# Altium PCB MB1520.PcbDoc (part 6 of 7)
Units mm, origin at the board's own origin, x right, y up, seen from the top; angles counter-clockwise.
Board outline 159 x 88 mm, 6 copper layers (Top Layer, Signal Layer 1, Signal Layer 2, Signal Layer 3, Signal Layer 4, Bottom Layer), stack 1.572 mm thick; 473 components, 377 nets, 1832 pads, 1378 vias.
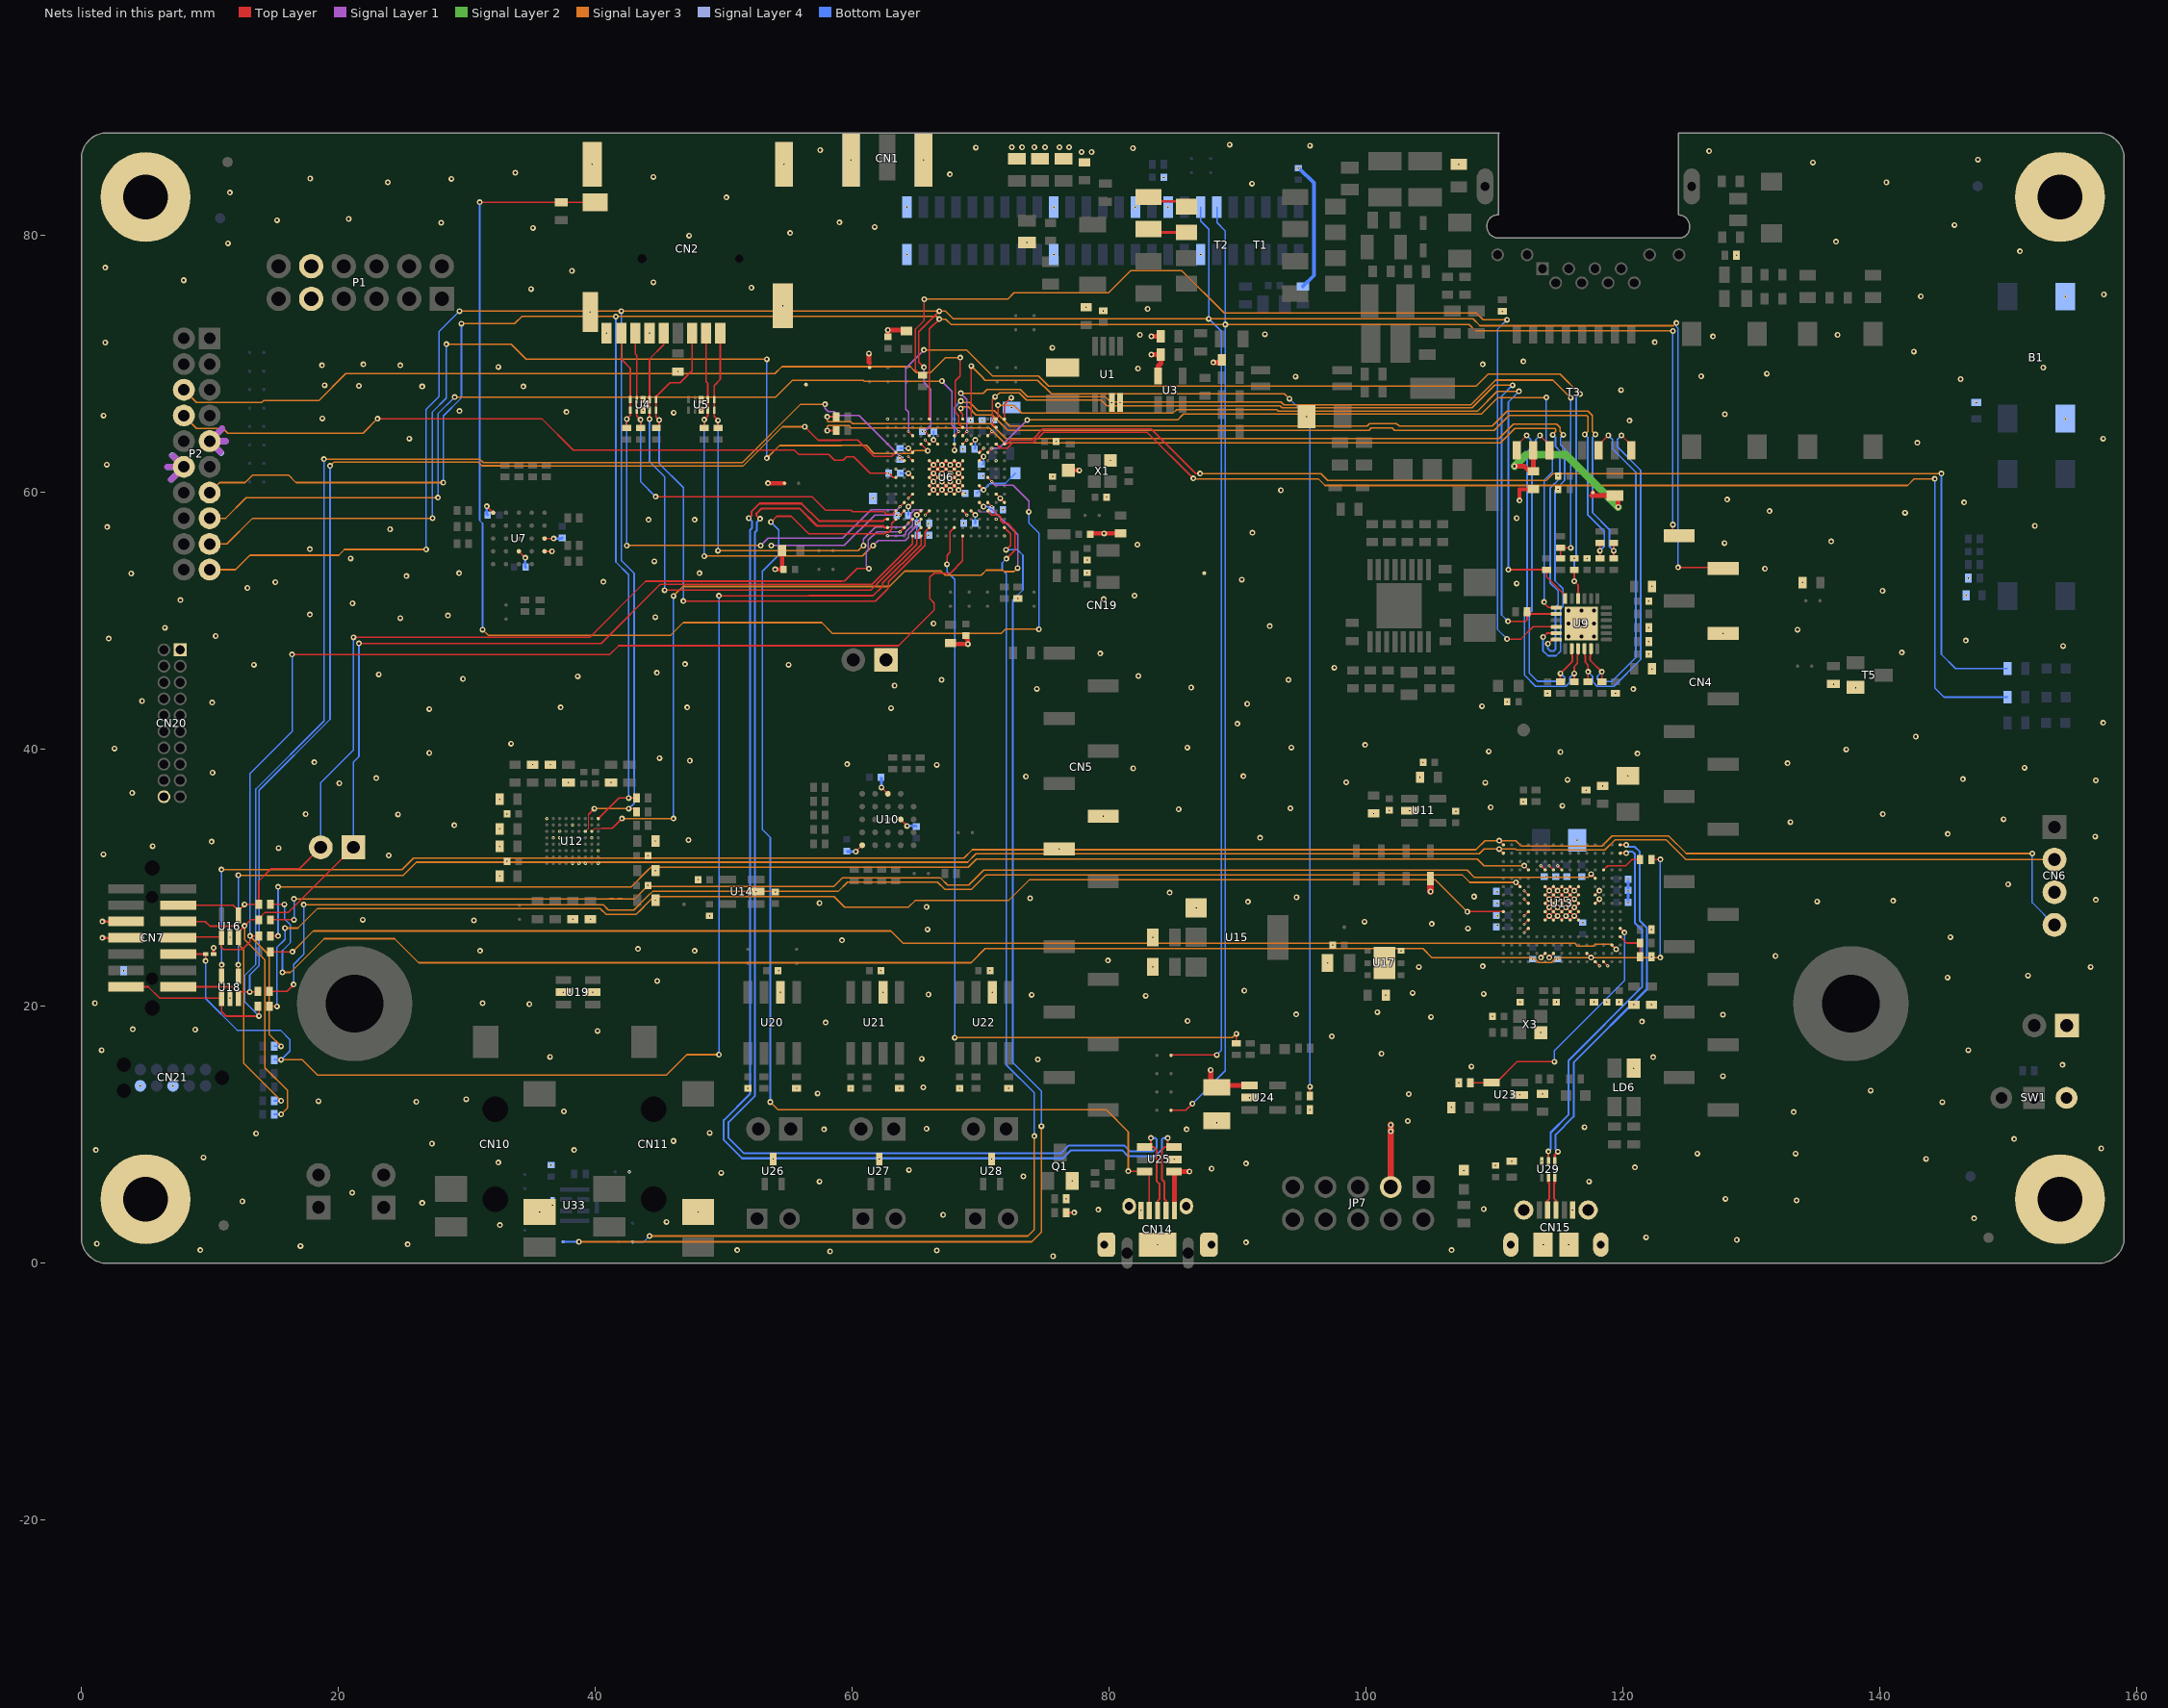
[diagram p9: the nets of this part, all layers, seen from the top]

## Via types
v1: diameter 0.45, hole 0.2, Top Layer to Bottom Layer, tented both sides, 1099 vias
v2: diameter 0.25, hole 0.1, Top Layer to Signal Layer 1, tented both sides, 217 vias
v3: diameter 0.25, hole 0.1, Signal Layer 4 to Bottom Layer, tented both sides, 53 vias
v4: diameter 0.6, hole 0.3, Top Layer to Bottom Layer, tented both sides, 9 vias

## Nets (pads, with @x,y where several pads share a name; then routed paths per layer and width w, separated by ;. In a path a pad name is that pad's centre, name@x,y a point inside that pad or via, vN(x,y) a via of type N, cw(c..) or ccw(c..) an arc to the next point about the centre after c; other vN are vias at no path point) (continued)
POE7: B1.1 B1.2 C3.1 C4.1 C5.1 C6.1 C11.1 C21.1 C22.1 C23.2 C24.2 C25.2 C26.1 C30.2 C32.1 C33.1 C34.2 C35.1 C36.2 C37.1 C38.1 C43.1 C44.1 C45.1 C46.2 C47.2 C48.1 C49.1 C50.1 C51.1 C53.1 C54.2 C55.2 C56.1 C61.2 C62.1 C63.1 C65.1 C66.1 C67.1 C70.1 C71.1 C72.1 C73.2 C74.1 C75.1 C76.1 C77.2 C78.2 C79.1 C80.1 C81.2 C82.2 C83.1 C84.1 C85.1 C86.2 C87.1 C88.1 C91.1 C92.1 C93.1 C94.1 C95.2 C96.1 C97.1 C98.1 C99.1 C100.1 C101.1 C102.1 C103.1 C104.1 C105.1 C106.1 C107.1 C108.1 C109.1 C110.1 C111.1 C112.2 C113.1 C114.1 C115.1 C116.2 C117.1 C120.1 C121.1 C122.1 C123.2 C124.1 C125.1 C126.1 C127.1 C128.1 C129.1 C130.2 C131.1 C132.1 C133.1 C134.1 C135.1 C136.1 C137.1 C139.1 C140.1 C141.1 C142.1 C143.1 C144.1 C145.1 C146.1 C147.1 C148.1 C149.1 C150.1 C151.1 C152.1 C153.1 C154.1 C155.1 C156.1 C157.1 C158.2 CN1.2 CN1.3 CN1.4 CN1.5 CN2.6 CN2.9 CN2.11 CN2.12 CN2.13 CN2.14 CN4.7 CN5.6 CN5.7 CN6.3 CN7.5 CN7.7 CN10.3 CN11.3 CN14.5 CN14.6 CN14.7 CN14.8 CN14.9 CN14.10 CN15.5 CN15.6 CN15.7 CN15.8 CN15.9 CN15.10 CN15.11 CN19.1 CN19.2 CN19.19 CN19.20 CN19.30 CN19.34 CN19.37 CN20.1 CN20.20 CN21.3 CN21.5 H1.1 H2.1 H3.1 H4.1 JP3.1 LD5.2 LD6.1 P1.5 P1.11 P2.5 P2.16 Q1.2 R1.2 R6.1 R13.1 R16.1 R19.2 R21.1 R57.2 R64.1 R70.2 R71.1 R73.2 R80.2 R84.1 R85.1 R89.1 R105.1 R109.1 R113.2 R120.2 R122.2 R124.2 R127.2 R129.1 R133.2 R137.1 R142.1 R146.1 SB35.1 SW1.3 T1.5 T1.6 T2.7 T2.8 T5.2 TP1.1 TP2.1 U1.7 U1.8 U3.5 U4.3 U4.8 U5.3 U5.8 U6.A1 U6.A15 U6.C2 U6.D6 U6.D10 U6.E1 U6.F2 U6.F6 U6.F7 U6.F8 U6.F9 U6.F10 U6.F12 U6.G6 U6.G7 U6.G8 U6.G9 U6.G10 U6.H6 U6.H7 U6.H8 U6.H9 U6.H10 U6.J6 U6.J7 U6.J8 U6.J9 U6.J10 U6.J14 U6.K2 U6.K6 U6.K7 U6.K8 U6.K9 U6.K10 U6.K12 U6.L4 U6.M6 U6.M10 U6.N3 U6.R1 U6.R15 U7.B1 U7.B3 U7.C1 U7.E5 U9.EP U10.B3 U10.C1 U10.E5 U11.2 U12.A1 U12.A3 U12.A4 U12.A5 U12.C1 U12.D6 U12.E2 U12.E7 U12.E8 U12.F7 U12.G5 U12.H9 U13.D5 U13.D6 U13.D7 U13.D8 U13.D9 U13.F2 U13.F6 U13.F7 U13.F8 U13.F9 U13.F10 U13.F12 U13.G2 U13.G6 U13.G7 U13.G8 U13.G9 U13.G10 U13.G12 U13.H6 U13.H7 U13.H8 U13.H9 U13.H10 U13.H12 U13.J6 U13.J7 U13.J8 U13.J9 U13.J10 U13.K6 U13.K7 U13.K8 U13.K9 U13.K10 U13.M1 U13.M8 U13.M9 U13.N1 U14.2 U15.1 U16.2 U17.6 U17.EP U18.2 U19.2 U19.5 U20.2 U21.2 U22.2 U23.2 U24.2 U25.2 U26.3 U27.3 U28.3 U29.3 U30.2 U31.2 U32.2 U33.5 U34.2 X1.2 X3.2 | length 138.7
  Top Layer w0.1: U6.R1@71.85,65.725 71.85,66.85 v1(72.375,67.375)
  Top Layer w0.12: v2(112.308,25.752) U13.D5@112.633,26.077 ; v2(112.308,26.402) U13.D6@112.633,26.727 ; v2(112.308,27.052) U13.D7@112.633,27.377 ; v2(112.308,28.352) U13.D8@112.633,28.027 ; v2(112.308,29.002) U13.D9@112.633,28.677 ; v1(113.608,23.802) U13.F2@113.933,24.127 ; v2(113.608,30.952) U13.F12@113.933,30.627 ; U13.F6@113.933,26.727 U13.G7@114.583,27.377 ; U13.F10@113.933,29.327 v1(114.258,29.002) U13.G9@114.583,28.677 ; v1(114.258,23.802) U13.G2@114.583,24.127 ; v2(114.258,30.952) U13.G12@114.583,30.627 ; v2(114.908,30.952) U13.H12@115.233,30.627 ; U13.K8@116.533,28.027 v1(116.208,28.352) U13.J9@115.883,28.677 ; U13.K10@116.533,29.327 U13.J9@115.883,28.677 ; U13.K6@116.533,26.727 v1(116.208,27.052) U13.J7@115.883,27.377 ; U13.K8@116.533,28.027 U13.J7@115.883,27.377 ; U13.M1@117.833,23.477 v2(118.158,23.152) ; U13.M8@117.833,28.027 v1(118.158,28.352) ; U13.M9@117.833,28.677 v1(118.158,29.002) ; U13.N1@118.483,23.477 v2(118.808,23.152) ; U13.G7@114.583,27.377 v1(114.908,27.052) U13.H6@115.233,26.727 U13.J7@115.883,27.377 ; U13.G7@114.583,27.377 v1(114.258,27.702) U13.F8@113.933,28.027 U13.G9@114.583,28.677 ; U13.G7@114.583,27.377 U13.H8@115.233,28.027 ; U13.G8@114.583,28.027 U13.F7@113.933,27.377 v1(114.258,27.052) U13.G6@114.583,26.727 U13.H7@115.233,27.377 ; U13.G8@114.583,28.027 v1(114.908,27.702) U13.H7@115.233,27.377 ; U13.G8@114.583,28.027 U13.H9@115.233,28.677 ; U13.G8@114.583,28.027 v1(114.258,28.352) U13.F9@113.933,28.677 U13.G10@114.583,29.327 v1(114.908,29.002) U13.H9@115.233,28.677 ; U13.G9@114.583,28.677 v1(114.908,28.352) U13.H8@115.233,28.027 ; U13.G9@114.583,28.677 U13.H10@115.233,29.327 v1(115.558,29.002) U13.J9@115.883,28.677 ; U13.H7@115.233,27.377 v1(115.558,27.052) U13.J6@115.883,26.727 U13.K7@116.533,27.377 v1(116.208,27.702) U13.J8@115.883,28.027 ; U13.H7@115.233,27.377 U13.J8@115.883,28.027 ; U13.H8@115.233,28.027 v1(115.558,27.702) U13.J7@115.883,27.377 ; U13.H8@115.233,28.027 U13.J9@115.883,28.677 ; U13.H9@115.233,28.677 v1(115.558,28.352) U13.J8@115.883,28.027 ; U13.H9@115.233,28.677 U13.J10@115.883,29.327 v1(116.208,29.002) U13.K9@116.533,28.677 U13.J8@115.883,28.027
  Top Layer w0.127: v1(31.55,58.925) U7.E5@32.05,58.425 ; U7.B3@34.05,55.425 v1(34.55,54.925) ; U7.B1@36.05,55.425 v1(36.625,55.425) ; U7.C1@36.05,56.425 v1(36.75,56.425) ; C47.2@54.55,54.125 C47.2@54.65,54.025 ; v1(60.275,32.05) U10.E5@60.775,32.55 ; v1(62.275,37.05) U10.C1@62.775,36.55 ; v2(62.745,56.629) U6.A15@62.75,56.625 ; U10.B3@63.775,34.55 v1(64.275,34.05) ; v2(64.375,59.55) U6.F12@64.7,59.875 ; v2(64.375,62.8) U6.K12@64.7,62.475 ; v2(65.675,58.25) U6.D10@66,58.575 ; v2(65.675,64.1) U6.M10@66,63.775 ; U6.F10@66,59.875 v1(66.325,60.2) ; U6.K10@66,62.475 v1(66.325,62.15) ; U6.F8@67.3,59.875 v1(66.975,60.2) ; U6.F8@67.3,59.875 v1(67.625,60.2) ; U6.G8@67.3,60.525 v1(67.625,60.2) ; U6.D6@68.6,58.575 v2(68.925,58.25) ; U6.F6@68.6,59.875 v1(68.275,60.2) ; U6.K6@68.6,62.475 v1(68.275,62.15) ; U6.M6@68.6,63.775 v2(68.925,64.1) ; U6.L4@69.9,63.125 v2(70.225,63.45) ; U6.N3@70.55,64.425 v2(70.875,64.75) ; U6.F2@71.2,59.875 v1(71.525,59.55) U6.E1@71.85,59.225 ; C43.1@78.525,56.75 C43.1@78.6,56.825 ; v1(66.325,60.2) U6.F9@66.65,59.875 v1(66.975,60.2) ; v1(66.325,60.2) U6.G10@66,60.525 v1(66.325,60.85) ; v1(66.325,60.2) U6.G9@66.65,60.525 ; v1(66.325,60.85) v1(66.975,61.5) ; v1(66.325,60.85) U6.G9@66.65,60.525 ; v1(66.325,60.85) U6.H10@66,61.175 v1(66.325,61.5) ; v1(66.325,61.5) v1(66.975,62.15) ; v1(66.325,61.5) U6.J10@66,61.825 v1(66.325,62.15) ; v1(66.325,61.5) v1(66.975,60.85) ; v1(66.325,62.15) U6.K9@66.65,62.475 v1(66.975,62.15) ; v1(66.325,62.15) v1(66.975,61.5) ; U6.G9@66.65,60.525 v1(66.975,60.85) ; U6.G9@66.65,60.525 v1(66.975,60.2) ; v1(66.975,60.2) U6.G8@67.3,60.525 ; v1(66.975,60.85) v1(67.625,61.5) ; v1(66.975,60.85) U6.G8@67.3,60.525 ; v1(66.975,61.5) v1(67.625,62.15) ; v1(66.975,61.5) v1(67.625,60.85) ; v1(66.975,62.15) v1(67.625,61.5) ; v1(66.975,62.15) U6.K8@67.3,62.475 v1(67.625,62.15) ; U6.G8@67.3,60.525 v1(67.625,60.85) ; v1(67.625,60.2) U6.F7@67.95,59.875 v1(68.275,60.2) ; v1(67.625,60.2) U6.G7@67.95,60.525 ; v1(67.625,60.85) U6.G7@67.95,60.525 ; v1(67.625,60.85) U6.H7@67.95,61.175 ; v1(67.625,61.5) U6.H7@67.95,61.175 ; v1(67.625,61.5) U6.J7@67.95,61.825 ; v1(67.625,62.15) U6.J7@67.95,61.825 ; v1(67.625,62.15) U6.K7@67.95,62.475 v1(68.275,62.15) ; U6.G7@67.95,60.525 v1(68.275,60.85) ; U6.G7@67.95,60.525 v1(68.275,60.2) ; U6.H7@67.95,61.175 v1(68.275,61.5) ; U6.H7@67.95,61.175 v1(68.275,60.85) ; U6.J7@67.95,61.825 v1(68.275,62.15) ; U6.J7@67.95,61.825 v1(68.275,61.5) ; v1(68.275,60.2) U6.G6@68.6,60.525 v1(68.275,60.85) ; v1(68.275,60.85) U6.H6@68.6,61.175 v1(68.275,61.5) ; v1(68.275,61.5) U6.J6@68.6,61.825 v1(68.275,62.15)
  Top Layer w0.2: v1(1.629,25.339) CN7.7@3.479,25.339 ; v1(1.629,26.609) CN7.5@3.479,26.609 ; U34.2@10.287,24.075 v1(10.287,24.563) ; T2.7@83.05,80.505 83.3,80.255 T1.6@86.023,80.255 ; T2.8@83.05,83.005 83.381,82.674 85.604,82.674 T1.5@86.023,82.255
  Top Layer w0.3: C25.2@88.547,70.125 C25.2@88.761,70.339 ; v1(111.95,59.375) 111.95,60.264 C33.1@113.011,60.264
  Top Layer w0.35: v1(54,54.025) C47.2@54.65,54.025 ; C47.2@54.55,54.125 C44.1@54.55,55.475 ; C23.2@62.775,72.125 v1(62.775,72.65) 64.15,72.65 C22.1@64.225,72.575 ; C53.1@67.65,48.3 67.55,48.2 v1(69,48.2) 69,48.55 68.85,48.7 C54.2@68.85,48.886 ; C43.1@78.6,56.825 C38.1@80.875,56.825
  Top Layer w0.4: v1(83.286,70.739) R21.1@84.011,70.739 84.011,70.036 83.811,69.836 U3.5@83.811,69.064 ; v1(83.286,72.164) R19.2@84.011,72.164 ; v1(88.1,70.125) C25.2@88.547,70.125
  Signal Layer 1 w0.09: 69.779,58.675 69.929,58.525 70.525,58.525
  Signal Layer 1 w0.1: v2@62.775,56.625 63.975,56.625 64.15,56.8 64.15,56.925 64.7,57.475 64.7,57.85 64.575,57.975 64.575,58.375 64.845,58.645 65.48,58.645 65.5,58.625
  Signal Layer 1 w0.5: 6.7,62 P2.16@7.975,62 ; 7,61.025 P2.16@7.975,62 ; 7.15,62.825 P2.16@7.975,62 ; 10.8,63.175 P2.5@9.975,64 ; 10.95,64.975 P2.5@9.975,64 ; 11.25,64 P2.5@9.975,64
  Signal Layer 4 w0.5: 6.75,62 P2.16@7.975,62 ; 7,61.025 P2.16@7.975,62 ; 7.075,62.9 P2.16@7.975,62 ; 10.875,63.1 P2.5@9.975,64 ; 10.95,64.975 P2.5@9.975,64 ; 11.2,64 P2.5@9.975,64
  Bottom Layer w0.127: C143.1@59.575,32.1 C143.1@59.625,32.05 ; C140.1@62.225,37.825 C140.1@62.275,37.775 ; C141.1@64.95,34.05 C141.1@65,34
  Bottom Layer w0.2: v1(31.55,58.925) 31.55,58.325 C132.1@31.625,58.25 ; v1(34.55,54.925) 34.55,54.215 C139.1@34.575,54.19 ; v1(36.75,56.425) 37.375,56.425 C136.1@37.425,56.475 ; C143.1@59.625,32.05 v1(60.275,32.05) ; v1(62.275,37.05) C140.1@62.275,37.775 ; v1(64.275,34.05) C141.1@64.95,34.05 ; v3(120.4,28.1) v3(120.4,29) C149.1@120.4,29.025 v3(120.4,29.875)
  Bottom Layer w0.3: v3(94.725,85.25) 94.78,85.25 95.925,84.105 95.925,76.9 R137.1@95.075,76.05
  other v1: 75.625,0.55 58.275,0.925 66.575,1 9.25,1.025 51.05,1.025 106.65,1.025 17.05,1.35 25.4,1.475 1.2,1.525 90.65,1.625 128.85,1.825 121.8,2.025 32.575,2.975 45.55,3.225 147.325,3.5 67.075,3.775 79.15,4.175 109.15,4.225 26.525,4.7 12.525,4.825 133.5,4.9 127.975,5.025 21.075,5.5 57.45,6.375 117.35,6.375 73.325,6.775 49.8,7.05 64.425,7.275 87.975,7.375 120.925,7.475 90.65,7.775 32.45,7.85 143.593,8.133 9.5,8.25 125.775,8.55 133.425,8.55 1.125,8.825 38.35,8.825 157.225,8.95 27.275,9.325 46.075,9.525 150.45,9.675 13.6,10.1 48.9,10.15 57.8,10.425 86.025,10.425 65.775,10.475 117,10.6 103.25,11.075 133.275,11.775 37.55,11.825 144.85,12.55 26.075,12.575 18.45,12.625 29.95,12.775 103.325,13.175 57.3,13.225 139.275,13.45 65.525,13.7 127.775,14.575 108.2,15.325 154.2,15.45 74.45,15.875 65.4,15.925 122.35,16.05 36.475,16.075 101.2,16.325 1.575,16.6 146.875,16.6 97.325,17.675 40.175,18.1 8.85,18.2 4,18.225 57.925,18.75 121.475,18.825 86.1,18.875 105.05,19.175 127.775,19.35 94.55,19.375 100.875,19.55 34.875,20.175 1.05,20.25 31.225,20.25 82.85,20.825 73.975,20.9 65.925,20.925 109.15,20.975 103.625,21.05 90.525,21.225 44.825,21.975 145.25,22.25 151.525,22.4 104.1,23.075 156.4,23.075 109.075,23.125 79.9,23.575 131.875,23.925 31.025,24.325 47.725,24.325 43.325,24.475 59.2,25.15 145.475,25.4 65.85,26 107.925,26.075 105.1,26.425 99.875,26.6 30.55,26.7 21.9,26.75 65.775,27.75 57.45,28.05 90.8,28.15 135.1,28.175 141.025,28.225 156.8,28.3 73.85,28.425 94.575,28.5 108.4,28.55 84.7,28.85 149.975,29.5 23.925,31.75 1.711,31.839 15.35,32.325 5.55,32.475 10.125,32.825 47.25,32.95 91.75,33.125 156.75,33.225 145.275,33.425 29.025,34.1 133.025,34.35 149.625,34.575 24.65,34.95 17.45,34.975 140.225,34.975 85.4,35.35 94.1,35.425 109.7,35.5 115.275,35.625 3.95,36.625 20.075,37.375 109.275,37.425 98.45,37.45 156.8,37.6 115.675,37.65 146.45,37.7 22.95,37.775 73.525,37.9 90.45,37.925 10.2,38.2 81.875,38.525 151.25,38.575 66.575,38.8 59.6,38.85 132.8,38.925 18.125,39 47.35,39.125 45,39.325 121.125,39.675 27.075,39.725 115.125,39.8 109.55,39.85 137.375,40 2.575,40.075 86.075,40.15 94.175,40.15 99.925,40.35 33.45,40.45 142.775,41 89.975,42 157.375,42.075 27.075,43.15 63.025,43.225 37.3,43.275 47.15,43.275 109.025,43.375 90.75,43.55 10.175,43.65 4.725,43.775 120.8,44.7 74.375,44.725 86.375,44.825 63.3,44.975 66.95,45.425 93.95,45.425 29.7,45.5 38.625,45.7 82.275,45.725 23.15,45.85 44.8,45.975 97.525,46.375 13.425,46.6 55.05,46.6 46.975,46.65 79.3,47.475 141.7,47.55 154.25,48.05 146.675,48.475 2.125,48.625 10.45,48.825 133.575,49.325 6.5,49.475 92.5,49.6 66.325,49.8 24.825,50.225 44.675,50.3 28.525,50.425 17.775,50.5 21.1,51.375 7.7,51.625 79.575,51.7 81.975,51.975 140.2,52.35 12.925,52.575 111.725,52.925 15.1,53.025 40.625,53.05 90.325,53.225 25.3,53.5 3.875,53.7 29.4,53.725 48.1,53.725 131.05,54.075 44.6,54.65 20.95,54.875 17.775,55.6 82.2,55.95 127.9,56.075 136.2,56.2 79.6,56.825 91.15,56.875 24.025,57.15 2,57.325 152.05,57.4 44.15,57.875 47.725,57.875 111.725,58 141.95,58.425 131.4,58.55 146.55,59.225 128.1,59.45 93.375,60.175 1.975,62.175 142.9,63.875 25.525,64.2 157.375,64.2 120.5,65.6 18.75,65.775 1.725,66 127.925,66.1 46.1,66.225 37.75,66.275 29.425,66.35 119.85,67.975 26.525,68.25 34.4,68.25 21.6,68.3 18.925,68.35 146.275,68.825 94.5,69.025 126.075,69.05 131.2,69.25 82.25,69.65 152.7,69.725 32.45,69.775 18.725,69.9 24.825,69.9 21.95,69.975 109.075,69.975 112.25,70.2 142.625,70.975 75.575,71.275 1.85,71.675 122.475,71.7 127,72.15 82.4,72.275 136.7,72.275 92.125,72.325 83,74.3 143.175,75.275 157.425,75.425 35,75.85 52.15,75.95 44.525,76.375 7.95,76.525 38.175,77.25 1.85,77.5 150.9,78.775 11.4,79.4 136.575,79.525 47.3,80 55.175,80.2 35.15,80.6 61.75,80.675 145.8,80.825 28,81 59,81.025 15.225,81.2 20.8,81.3 50.2,82.975 11.55,83.35 91.125,84.05 23.85,84.15 140.5,84.15 28.8,84.425 17.8,84.45 44.525,84.575 67.6,84.775 33.775,84.9 134.775,85.7 147.625,85.925 77.85,86.5 78.625,86.5 126.7,86.575 57.5,86.65 81.85,86.8 69.625,86.85 72.425,86.875 73.225,86.875 74.175,86.875 75,86.875 76.125,86.875 76.875,86.875 95.625,87 89.375,87.075
  other v2: 83.775,1.45 113.775,1.45 115.775,1.45 35.675,4 48,4 82.475,4.125 116.075,4.15 76.65,5.025 77.125,6.425 107.611,7.227 110.061,7.614 111.336,7.964 113.686,7.964 85.05,8.1 53.85,8.125 62.1,8.125 70.85,8.125 88.375,10.937 95.625,11.95 106.636,12.139 90.925,12.9 111.961,13.114 113.725,13.2 51.875,13.625 55.675,13.625 59.875,13.625 63.675,13.625 68.375,13.625 72.175,13.625 107.211,14.064 120.836,15.189 113.611,17.964 109.836,19.214 120.836,20.139 122.211,20.139 111.986,20.339 114.811,20.339 117.736,20.339 118.736,20.339 119.686,20.339 11.561,20.639 101.525,20.875 37.5,21.1 39.8,21.1 54.41,21.1 62.41,21.1 70.91,21.1 54.275,22.775 62.225,22.775 70.725,22.775 83.4,23.075 97,23.375 101.425,23.375 122.211,23.864 102.725,24.325 97.4,24.775 83.4,25.375 11.561,25.389 122.211,25.989 38.25,26.8 39.625,26.8 48.9,27.05 86.775,27.675 44.675,28.275 54.025,28.9 52.525,28.925 44.1,29.425 48,29.875 32.55,30.15 44.675,30.575 38.225,31.125 38.725,31.125 39.225,31.125 40.225,31.125 33.125,31.3 44.1,31.725 40.225,32.125 76.112,32.26 32.55,32.45 37.725,32.625 44.675,32.875 36.725,33.125 37.225,33.125 39.725,33.125 37.225,33.625 32.55,33.825 38.225,34.125 36.225,34.625 79.541,34.8 33.125,34.975 100.586,35.014 106.986,35.189 103.386,35.239 101.811,35.264 112.236,35.939 32.55,36.125 117.111,36.839 118.411,37.164 37.9,37.425 41.225,37.425 104.186,37.839 120.381,37.95 35.125,38.825 36.5,38.825 104.436,38.989 110.975,43.725 114.125,44.375 119.4,44.375 138.111,44.814 136.386,45.064 122.25,46.275 122,47.425 122,48.4 127.8,49.024 122,49.475 122,51.55 72.9,51.75 122.25,52.7 133.975,53 78.275,53.75 78.275,54.75 116.2,54.875 117.2,54.875 71.85,56.625 71.2,57.925 79.8,59.65 114.95,60.25 75.6,61.25 114.95,61.3 63.4,61.825 71.2,62.475 80.1,62.5 75.875,63.975 62.75,65.725 95.359,65.91 43.725,66.415 48.25,66.415 80.2,67 80.85,67 43.725,67.235 48.25,67.235 46.425,69.425 40.875,72.4 44.225,72.4 39.6,74.05 110.6,74.1 79.536,74.139 78.211,74.439 54.6,74.55 128.832,78.483 73.611,79.464 39.75,85.55 54.7,85.55 107.211,85.539 59.9,85.9 65.55,85.9
  other v3: 36.674,4.523 42.649,7.123 36.549,7.648 4.585,13.815 7.125,13.815 3.286,22.789 112.975,23.675 114.9,23.675 110.225,26.325 116.875,26.525 110.225,27.05 110.211,28.014 110.211,28.914 114,30.1 114.8,30.1 115.6,30.1 116.8,30.1 116.425,32.925 146.7,52 146.875,53.35 65.925,56.675 65.925,57.575 68.675,57.6 63.45,58.225 71.725,58.65 61.625,59.55 68.8,59.95 70.175,61.3 62.825,61.5 63.7,62.55 68.625,63.375 65.45,64.775 69.2,65.625 70.125,65.625 71.025,65.625 154.425,65.75 72.4,66.625 147.5,67 154.425,75.25 64.26,78.531 75.69,78.531 87.12,78.531 64.26,82.217 75.69,82.217 82.04,82.217 84.58,82.217 84.25,84.525 59.9,85.9 65.55,85.9
  other v4: 115.75,48.8 116.75,48.8 117.75,48.8 115.75,49.8 116.75,49.8 117.75,49.8 115.75,50.8 116.75,50.8 117.75,50.8
RD_N: R78.1 T3.8 U9.22 | length 28.2
  Top Layer w0.13: U9.22@117,47.85 117,47.36 117.059,47.3 117.059,46.792 117.275,46.577 v1(117.275,46.05) R78.1@117.275,45.275 ; v1(119.875,64.45) 120.631,63.694 T3.8@120.631,63.279
  Bottom Layer w0.13: v1(117.275,46.05) 117.622,45.703 117.622,45.289 117.992,44.919 119.283,44.919 121.375,47.011 121.375,61.735 119.552,63.558 119.552,64.127 v1(119.875,64.45)
RD_P: R79.1 T3.6 U9.23 | length 27.2
  Top Layer w0.13: U9.23@117.5,47.85 117.5,47.36 117.44,47.3 117.44,46.95 v1(118.35,46.04) R79.1@118.35,45.275 ; T3.6@118.091,63.279 118.091,63.694 v1(118.848,64.45)
  Bottom Layer w0.13: v1(118.35,46.04) 118.003,45.693 118.003,45.447 118.15,45.3 119.125,45.3 120.994,47.169 120.994,61.577 119.171,63.4 119.171,64.127 v1(118.848,64.45)
RMII_CRS_DV: R51.2 R56.1 U6.N6 | length 66.4
  Top Layer w0.12: R56.1@115.125,54.875 R51.2@115.125,55.7 v1(115.925,55.7)
  Top Layer w0.127: U6.N6@68.6,64.425 v2(68.925,64.75)
  Signal Layer 1 w0.1: v1(68.45,67.725) 68.925,67.25 v2(68.925,64.75)
  Signal Layer 3 w0.1: v1(68.45,67.725) 70.175,67.725 70.475,68.025 73.061,68.025 73.636,67.45 75.425,67.45
  Signal Layer 3 w0.12: 75.425,67.45 79.7,67.45 80.1,67.05 93.375,67.05 93.594,66.831 108.154,66.831 110.078,68.755 114.545,68.755 v1(115.925,67.375)
  Bottom Layer w0.12: v1(115.925,55.7) v1(115.925,67.375)
RMII_MDC: U6.L3 U9.13 | length 62.8
  Top Layer w0.12: v1(113.85,51.475) 113.85,51.398 114.198,51.05 U9.13@114.8,51.05
  Top Layer w0.127: U6.L3@70.55,63.125 v2(70.875,63.45)
  Signal Layer 1 w0.1: v2(70.875,63.45) 71.425,63.45 v1(73.625,65.65)
  Signal Layer 3 w0.1: v1(73.625,65.65) 75.425,65.65
  Signal Layer 3 w0.12: 75.425,65.65 85.325,65.65 85.78,66.105 108.98,66.105 110.275,67.4 v1(114.025,67.4)
  Bottom Layer w0.12: v1(113.85,51.475) 113.85,60.95 114.5,61.6 114.5,62.575 114.025,63.05 v1(114.025,67.4)
RMII_MDIO: R55.1 U6.R2 U9.12 | length 62.7
  Top Layer w0.1: U6.R2@71.2,65.725 71.35,65.875 v1(71.35,66.8)
  Top Layer w0.12: v1(111.075,54) 114.025,54 R55.1@114.05,53.975 114.05,53.431 115.5,51.981 U9.12@115.5,51.75
  Signal Layer 3 w0.1: v1(71.35,66.8) 72.6,66.8 73.2,66.2 75.425,66.2
  Signal Layer 3 w0.12: 75.425,66.2 85,66.2 85.25,66.45 93.05,66.45 93.155,66.345 108.67,66.345 110.2,67.875 v1(111.9,67.875)
  Bottom Layer w0.12: v1(111.075,54) 111.075,67.05 v1(111.9,67.875)
RMII_REF_CLK: R67.2 U6.P2 U9.14 | length 67.7
  Top Layer w0.1: v1(71.125,67.45) 70.9,67.225 70.9,65.375 U6.P2@71.2,65.075
  Top Layer w0.127: v1(111.048,49.975) 112.425,49.975 112.525,50.075 R67.2@112.525,50.725 112.7,50.55 U9.14@114.8,50.55
  Signal Layer 3 w0.1: v1(71.125,67.45) 71.45,67.775 73,67.775 73.579,67.196
  Signal Layer 3 w0.102: 73.579,67.196 79.354,67.196 79.8,66.75 93.3,66.75 93.45,66.6 108.25,66.6 110,68.35 v1(111.4,68.35)
  Bottom Layer w0.127: v1(111.048,49.975) 110.55,50.473 110.55,67.5 v1(111.4,68.35)
RMII_RX_ER: R57.1 U6.N12 U9.10 | length 77.9
  Top Layer w0.12: R57.1@116.2,53.975 v1(116.2,53.1) 116.5,52.8 U9.10@116.5,51.75
  Top Layer w0.127: v2(64.375,64.75) U6.N12@64.7,64.425
  Signal Layer 1 w0.1: v2(64.375,64.75) 64.375,66.275 64.155,66.495 64.155,69.68 v1(65.575,71.1)
  Signal Layer 3 w0.1: 74.5,69.075 75.3,68.275 75.425,68.275
  Signal Layer 3 w0.12: v1(65.575,71.1) 68.9,71.1 70.925,69.075 74.5,69.075 ; 75.425,68.275 108.55,68.275 109.5,69.225 115.1,69.225 v1(116.65,67.675)
  Bottom Layer w0.12: v1(116.2,53.1) 116.2,54.925 116.35,55.075 116.35,67.375 v1(116.65,67.675)
RMII_RXD0: R49.1 R58.1 U6.R6 | length 63.7
  Top Layer w0.1: v1(68.45,66.55) 68.45,66.275 68.6,66.125 U6.R6@68.6,65.725
  Top Layer w0.13: R58.1@118.2,54.875 v1(118.2,55.475) R49.1@118.2,56.075
  Signal Layer 3 w0.104: v1(68.45,66.55) 68.572,66.672 69.025,66.672 69.647,66.05 70.9,66.05 72.106,64.844 100.212,64.844 100.393,65.025 102.019,65.025 102.2,64.844 109.962,64.844 111.118,66 117.15,66 117.269,65.881 117.269,64.775 v1(117.019,64.525)
  Bottom Layer w0.13: v1(117.019,64.525) 117.244,64.3 117.244,58.281 118.547,56.978 118.547,55.822 v1(118.2,55.475)
RMII_RXD1: R50.1 R59.1 U6.M7 | length 67.9
  Top Layer w0.1: v1(67.95,63.3) U6.M7@67.95,63.775
  Top Layer w0.13: R59.1@119.275,54.875 v1(119.275,55.475) R50.1@119.275,56.075
  Signal Layer 3 w0.104: v1(68.45,67.125) 68.572,67.003 69.162,67.003 69.784,66.381 71.037,66.381 72.243,65.175 100.075,65.175 100.275,65.375 102.375,65.375 102.575,65.175 109.825,65.175 110.981,66.331 117.287,66.331 117.6,66.018 117.6,64.775 v1(117.85,64.525)
  Bottom Layer w0.1: v1(67.95,63.3) 67.95,66.615 67.965,66.631 67.965,66.64 v1(68.45,67.125)
  Bottom Layer w0.13: v1(117.85,64.525) 117.625,64.3 117.625,58.439 118.928,57.136 118.928,55.822 v1(119.275,55.475)
RMII_TX_EN: R24.1 U9.16 | length 84.2
  Top Layer w0.12: R24.1@65.475,69.125 65.35,69.125 64.925,69.55 64.925,72.725 65.6,73.4 v1(65.6,75.05) ; v1(110.975,48.6) 112.05,48.6 113,49.55 U9.16@114.8,49.55
  Signal Layer 3 w0.12: v1@65.689,75.139 v1(65.6,75.05) 72.1,75.05 72.6,75.55 79.95,75.55 81.675,77.275 85.65,77.275 88.95,73.975 108.575,73.975 109.1,73.45 v1(110.975,73.45)
  Bottom Layer w0.12: v1(110.975,48.6) 110.216,49.359 110.216,72.691 v1(110.975,73.45)
RMII_TXD0: R25.1 U9.17 | length 81.5
  Top Layer w0.13: v1(58.05,65.9) R25.1@58.75,65.9 ; v1(113.775,48.75) 114.075,49.05 U9.17@114.8,49.05
  Signal Layer 3 w0.104: v1(58.05,65.9) 58.05,65.603 58.125,65.528 59.865,65.528 60.034,65.359 70.809,65.359 71.962,64.206 110.331,64.206 111.456,65.331 114.837,65.331 115.106,65.062 115.106,64.75 v1(115.356,64.5)
  Bottom Layer w0.13: v1(113.775,48.75) 113.76,48.735 113.76,47.701 114.167,47.294 114.783,47.294 115.131,47.642 115.131,50.931 115.331,51.131 115.331,52.508 115.325,52.514 114.703,53.136 114.703,60.189 115.456,60.942 115.456,63.394 115.131,63.719 115.131,64.275 v1(115.356,64.5)
RMII_TXD1: R32.1 U9.18 | length 78.8
  Top Layer w0.13: v1(58.05,64.825) R32.1@58.75,64.825 ; v1(114.15,48.225) 114.475,48.55 U9.18@114.8,48.55
  Signal Layer 3 w0.104: v1(58.05,64.825) 58.05,65.122 58.125,65.197 59.728,65.197 59.897,65.028 70.672,65.028 71.825,63.875 110.468,63.875 111.593,65 114.7,65 114.775,64.925 114.775,64.75 v1(114.525,64.5)
  Bottom Layer w0.13: v1(114.15,48.225) 114.15,47.85 114.325,47.675 114.625,47.675 114.75,47.8 114.75,51.089 114.95,51.289 114.95,52.35 114.322,52.978 114.322,60.347 115.075,61.1 115.075,63.236 114.75,63.561 114.75,64.275 v1(114.525,64.5)
SAI1_SD_A: U6.E3 U12.F2 | length 58.2
  Top Layer w0.09: U12.F2@39.725,33.625 39.975,33.875 40.55,33.875
  Top Layer w0.1: 40.55,33.875 41.325,33.875 v1(42.075,34.625)
  Top Layer w0.127: U6.E3@70.55,59.225 v2(70.875,58.9)
  Signal Layer 1 w0.1: v2(70.875,58.9) 70.875,58.7 72.875,56.7 v1(72.875,54.125)
  Signal Layer 3 w0.1: v1(42.075,34.625) 44.1,34.625
  Signal Layer 3 w0.12: 44.1,34.625 v1(46.075,34.625) ; v1(46.075,51.95) 46.814,52.689 62.889,52.689 64.085,53.885 66.92,53.885 67.23,53.575 70.05,53.575 70.435,53.96 71.715,53.96 71.83,53.845 72.595,53.845 v1(72.875,54.125)
  Bottom Layer w0.12: v1(46.075,34.625) v1(46.075,51.95)
SAI4_CK2: SB40.2 U6.D3 | length 90.4
  Top Layer w0.1: U6.D3@70.55,58.575 70.875,58.25 71.375,58.25 71.525,58.1 71.525,57.825 71.75,57.6 72.1,57.6 72.675,57.025 72.675,55.525 v1(72,54.85)
  Signal Layer 3 w0.12: v1(44.225,2.125) 73.675,2.125 74.175,2.625 v1(74.175,9.9)
  Bottom Layer w0.12: SB40.2@42.899,1.673 43.773,1.673 v1(44.225,2.125) ; v1(72,54.85) 71.675,54.525 71.675,54 71.998,53.676 71.998,15.452 74.175,13.275 v1(74.175,9.9)
SAI4_D2: SB39.2 U6.B1 | length 95
  Top Layer w0.1: U6.B1@71.85,57.275 72.325,56.8 72.325,55.9 v1(71.975,55.55)
  Signal Layer 3 w0.12: v1(38.725,1.675) 73.975,1.675 74.725,2.425 v1(74.725,10.675)
  Bottom Layer w0.12: SB39.2@37.5,1.675 v1(38.725,1.675) ; v1(71.975,55.55) 72.85,55.55 73.28,55.12 73.28,52.429 72.5,51.649 72.5,15.625 74.725,13.4 v1(74.725,10.675)
SCL: CN4.10 CN19.40 P2.7 R90.1 SB34.1 U6.R10 U12.H1 | length 265.7
  Top Layer w0.1: U12.H1@40.225,34.625 41.825,36.225 v1(42.6,36.225) R90.1@43.2,36.225 ; U6.R10@66,65.725 66.009,65.734 66.009,69.075
  Top Layer w0.12: 66.009,69.075 66.009,72.734 v1(66.775,73.5) ; SB34.1@84.811,11.914 85.964,11.914 v1(86.475,12.425) ; v1(123.875,57.5) 123.875,57.142 CN4.10@124.372,56.644
  Signal Layer 3 w0.12: P2.7@9.975,60 10.75,60.775 12.75,60.775 13.325,61.35 16.125,61.35 16.7,60.775 v1(28.167,60.775) ; v1(29.575,73.15) 33.725,73.15 34.3,73.725 41.72,73.725 41.725,73.72 66.555,73.72 v1(66.775,73.5) 67.275,73.5 67.695,73.08 v1(89.038,73.08) 108.02,73.08 108.52,72.58 v1(123.875,72.58)
  Bottom Layer w0.1: v1@42.6,36.25 42.6,37.8
  Bottom Layer w0.12: v1(28.167,60.775) 28.167,65.967 29.575,67.375 v1(29.575,73.15) ; v1(41.6,73.7) 41.6,54.6 42.6,53.6 42.6,37.8 ; v1(86.475,12.425) 89.038,14.988 v1(89.038,73.08) 89.038,80.361 88.39,81.009 CN19.40@88.39,82.217 ; v1(123.875,57.5) v1(123.875,72.58)
SDA: CN4.9 CN19.38 P2.10 R92.1 SB31.1 U6.N10 U12.F3 | length 281.2
  Top Layer w0.09: U12.F3@39.225,33.625 39.475,33.875 39.475,34.95
  Top Layer w0.1: 39.475,34.95 v1(39.925,35.4) ; v1(42.6,35.4) R92.1@43.2,35.4
  Top Layer w0.12: v1(65.575,69.75) 65.17,70.155 65.17,72.52 v1(66.775,74.125) ; SB31.1@84.811,16.189 84.847,16.225 v1(88.375,16.225) ; v1(124.28,54.17) 127.576,54.17 127.721,54.025 CN4.9@127.8,54.104
  Top Layer w0.127: v2(65.675,64.75) U6.N10@66,64.425
  Signal Layer 1 w0.1: v1(65.575,69.75) 65.575,68.575 66.125,68.025 66.125,65.2 v2(65.675,64.75)
  Signal Layer 3 w0.1: v1(39.925,35.4) v1(42.6,35.4)
  Signal Layer 3 w0.12: P2.10@9.975,54 12,54 13.125,55.125 16.298,55.125 20.025,55.125 20.475,55.575 v1(26.825,55.575) ; v1(29.425,74.125) v1(66.775,74.125) 67.25,74.125 67.85,73.525 v1(87.753,73.525) 108.326,73.525 108.866,72.985 123.935,72.985 v1(124.15,73.2)
  Bottom Layer w0.1: v1(42.6,35.4) 43.025,35.825 43.025,37.8
  Bottom Layer w0.12: v1(26.825,55.575) 26.825,66.475 27.85,67.5 27.85,72.55 v1(29.425,74.125) ; v1(42.025,74.125) 42.025,54.714 43.025,53.714 43.025,37.8 ; CN19.38@87.12,82.217 87.12,81.129 87.753,80.496 v1(87.753,73.525) 88.73,72.548 88.73,16.58 v1(88.375,16.225) ; v1(124.15,73.2) 124.15,72.93 124.28,72.8 v1(124.28,54.17)
SDIO1_CK: CN2.5 U4.2 U4.9 U6.B11 | length 43.5
  Top Layer w0.1: 61.929,52.879 65.025,55.975 65.025,56.95 U6.B11@65.35,57.275
  Top Layer w0.127: v1(44.225,65.725) U4.9@44.225,66.415 U4.2@44.225,67.235 44.225,70.4 45.325,71.5 CN2.5@45.325,72.4 ; v1(45.4,52.4) 61.45,52.4 61.929,52.879
  Bottom Layer w0.127: v1(44.225,65.725) 44.225,62.4 45.4,61.225 v1(45.4,52.4)
SDIO1_CMD: CN2.3 R29.1 U4.1 U4.10 U6.B10 | length 46.5
  Top Layer w0.1: 62.804,52.625 62.804,53.029 65.675,55.9 65.675,56.95 U6.B10@66,57.275
  Top Layer w0.127: R29.1@44.75,65.025 44.975,65.25 v1(44.975,65.65) 44.725,65.9 U4.10@44.725,66.415 U4.1@44.725,67.235 44.725,67.45 45.825,68.55 46.6,68.55 47.525,69.475 CN2.3@47.525,72.4 ; v1(46.854,51.546) 61.804,51.546 62.783,52.525 62.783,52.604 62.804,52.625
  Bottom Layer w0.127: v1(44.975,65.65) 44.975,62.254 46.854,60.375 v1(46.854,51.546)
SDIO1_D0: CN2.7 R28.1 U4.4 U4.7 U6.D14 | length 33.4
  Top Layer w0.1: 59.167,58.633 59.91,58.633 60.042,58.5 62.464,58.5 62.644,58.32 63.145,58.32 U6.D14@63.4,58.575
  Top Layer w0.127: CN2.7@43.125,72.4 43.125,70.775 43.225,70.675 U4.4@43.225,67.235 U4.7@43.225,66.415 43.225,65.975 v1(43.525,65.675) R28.1@43.525,65.025 ; v1(44.7,59.675) 56.884,59.675 57.926,58.633 59.167,58.633
  Bottom Layer w0.127: v1(43.525,65.675) 43.525,60.85 v1(44.7,59.675)
SDIO1_D1: CN2.8 R27.1 U4.5 U4.6 U6.E13 | length 40.6
  Top Layer w0.127: CN2.8@42.025,72.4 42.025,70.375 42.725,69.675 U4.5@42.725,67.235 U4.6@42.725,66.415 42.725,66 v1(42.45,65.725) R27.1@42.45,65.025 ; v2(63.725,58.9) U6.E13@64.05,59.225
  Signal Layer 1 w0.1: v1(52.875,55.875) 53.45,56.45 59.275,56.45 61.475,58.65 63.475,58.65 v2(63.725,58.9)
  Signal Layer 3 w0.102: v1(42.45,55.875) v1(52.875,55.875)
  Bottom Layer w0.127: v1(42.45,55.875) v1(42.45,65.725)
SDIO1_D2: CN2.1 R31.1 U5.1 U5.10 U6.C12 | length 34.3
  Top Layer w0.127: R31.1@49.55,65.025 v1(49.55,65.625) 49.25,65.925 U5.10@49.25,66.415 U5.1@49.25,67.235 49.25,68.325 49.725,68.8 CN2.1@49.725,72.4 ; v2(64.375,57.6) U6.C12@64.7,57.925
  Signal Layer 1 w0.1: v1(60.875,55.875) 60.875,56.378 61.822,57.325 64.1,57.325 v2(64.375,57.6)
  Signal Layer 3 w0.1: 59.175,55.473 60.473,55.473 v1(60.875,55.875)
  Signal Layer 3 w0.102: v1(49.55,55.473) 59.175,55.473
  Bottom Layer w0.127: v1@49.55,55.473 v1(49.55,65.625)
SDIO1_D3: CN2.2 R30.1 U5.2 U5.9 U6.C11 | length 36.5
  Top Layer w0.127: R30.1@48.475,65.025 v1(48.475,65.675) 48.75,65.95 U5.9@48.75,66.415 U5.2@48.75,67.235 48.75,68.5 48.625,68.625 CN2.2@48.625,72.4 ; v2(65.025,57.6) U6.C11@65.35,57.925
  Signal Layer 1 w0.1: v1(61.625,55.875) 62.027,56.277 64.136,56.277 64.378,56.519 64.378,56.784 65.025,57.431 v2(65.025,57.6)
  Signal Layer 3 w0.1: 59.175,55.05 60.8,55.05 v1(61.625,55.875)
  Signal Layer 3 w0.102: v1(48.475,55.05) 59.175,55.05
  Bottom Layer w0.127: v1(48.475,55.05) v1(48.475,65.675)
STLK_SWCLK: CN6.2 U13.A14 U18.4 | length 151.6
  Top Layer w0.12: U18.4@12.211,22.339 v1(12.211,23.236) ; v1(110.358,32.252) U13.A14@110.683,31.927
  Signal Layer 3 w0.12: v1(12.211,30.211) 25.061,30.211 26.075,31.225 33.2,31.225 44.1,31.225 68.975,31.225 69.625,31.875 108.8,31.875 109.177,32.252 109.908,32.252 v1(110.358,32.252) 111.623,32.252 111.7,32.175 118.586,32.175 119.386,32.975 120.558,32.975 123.35,32.975 124.898,31.427 CN6.2@153.581,31.427
  Bottom Layer w0.12: v1(12.211,23.236) v1(12.211,30.211)
STLK_SWDIO: CN6.4 U13.A15 U18.5 | length 158
  Top Layer w0.12: U18.5@10.911,22.339 v1(10.911,23.236) ; v1(110.358,32.902) U13.A15@110.683,32.577
  Signal Layer 3 w0.12: v1(10.9,30.65) 24.95,30.65 25.85,31.55 33.2,31.55 44.1,31.55 68.7,31.55 69.35,32.2 108.55,32.2 109.252,32.902 109.908,32.902 v1(110.358,32.902) 111.66,32.902 112.087,32.475 118.35,32.475 119.15,33.275 120.558,33.275 123.55,33.275 124.925,31.9 v1(151.85,31.9)
  Bottom Layer w0.12: v1(10.9,30.65) 10.911,30.639 v1(10.911,23.236) ; v1(151.85,31.9) 151.85,28.078 CN6.4@153.581,26.347
STLK_VCP_RX: R110.2 U13.C10 | length 105.5
  Top Layer w0.12: R110.2@14.625,21.175 16,21.175 v1(16.525,21.7) ; v1(111.658,29.652) U13.C10@111.983,29.327
  Signal Layer 3 w0.12: v1(17.3,27.925) 33.2,27.925 40.6,27.925 41.025,27.5 43,27.5 44.1,28.6 44.45,28.95 58.9,28.95 59.63,29.68 66.645,29.68 67.2,29.125 69.3,29.125 70.425,30.25 107.475,30.25 108.073,29.652 109.908,29.652 v1(111.658,29.652)
  Bottom Layer w0.12: v1(16.525,21.7) 16.525,23.275 17.3,24.05 v1(17.3,27.925)
STLK_VCP_TX: R114.1 U13.A7 | length 105.4
  Top Layer w0.12: R114.1@14.625,20 v1(15.225,20) ; v1(107.873,27.377) U13.A7@110.683,27.377
  Signal Layer 3 w0.12: v1(15.85,26.1) 16.85,26.1 18.35,27.6 33.2,27.6 40.4,27.6 40.5,27.5 40.825,27.175 43.2,27.175 43.525,27.5 44.1,28.075 44.575,28.55 58.575,28.55 59.4,27.725 64.375,27.725 64.889,28.239 72.164,28.239 73.775,29.85 105.4,29.85 v1(107.873,27.377)
  Bottom Layer w0.12: v1(15.225,20) 15.225,24.6 15.85,25.225 v1(15.85,26.1)
STMOD#8-MOSIs: P2.8 U6.N7 | length 70.2
  Top Layer w0.127: U6.N7@67.95,64.425 v2(68.275,64.75)
  Signal Layer 1 w0.1: v1(66.975,68.675) 67.775,67.875 67.775,65.25 v2(68.275,64.75)
  Signal Layer 3 w0.12: P2.8@9.975,58 11.225,58 12.825,59.6 v1(27.75,59.6) ; v1(29.05,67.425) 54.025,67.425 55.336,68.736 60.864,68.736 60.925,68.675 v1(66.975,68.675)
  Bottom Layer w0.12: v1(27.75,59.6) 27.75,66.125 v1(29.05,67.425)
STMOD#9-MISOs: P2.9 U6.M11 | length 79.3
  Top Layer w0.127: U6.M11@65.35,63.775 v1(65.875,63.25)
  Signal Layer 3 w0.1: 59.175,63.662 61.088,63.662 61.695,63.055 64.63,63.055 64.825,63.25 v1(65.875,63.25)
  Signal Layer 3 w0.12: P2.9@9.975,56 11.325,56 13.325,58 v1(27.325,58) ; v1(28.4,71.55) 33.45,71.55 34.625,70.375 v1(53.35,70.375) ; v1(53.35,62.675) 54.337,63.662 59.175,63.662
  Bottom Layer w0.12: v1(27.325,58) 27.325,66.275 28.4,67.35 v1(28.4,71.55) ; v1(53.35,62.675) v1(53.35,70.375)
STMOD#13-ADC: P2.13 U6.P6 | length 68.5
  Top Layer w0.1: 68.406,69.075 68.025,68.694 68.025,66.25 68.3,65.975 68.3,65.375 U6.P6@68.6,65.075
  Top Layer w0.127: 68.406,69.075 v1(68.406,70.5)
  Signal Layer 3 w0.1: P2.13@7.975,68 8.975,67 11.025,67
  Signal Layer 3 w0.12: 11.025,67 14.025,67 14.175,67.15 18.475,67.15 20.575,69.25 53.975,69.25 54.525,69.8 64.525,69.8 64.98,69.345 66.095,69.345 67.25,70.5 v1(68.406,70.5)
STMOD#14-PWM: P2.14 U6.H14 | length 58.6
  Top Layer w0.1: 59.175,62.525 59.295,62.525 59.545,62.775 60.125,62.775 61.4,61.5 62.875,61.5 63.2,61.175 U6.H14@63.4,61.175
  Top Layer w0.12: v1(23.05,65.75) 35.825,65.75 38.275,63.3 55.5,63.3 55.825,62.975 56.125,62.975
  Top Layer w0.127: 56.125,62.975 58.175,62.975 58.625,62.525 59.175,62.525
  Signal Layer 3 w0.1: P2.14@7.975,66 8.975,65 11.025,65
  Signal Layer 3 w0.12: 11.025,65 11.4,64.625 21.925,64.625 v1(23.05,65.75)
T_JTDI: CN7.10 R148.1 U6.A11 U34.1 | length 105
  Top Layer w0.1: 62.375,52.95 65.35,55.925 U6.A11@65.35,56.625
  Top Layer w0.12: CN7.10@7.543,24.069 7.549,24.075 U34.1@9.663,24.075 v1(9.663,23.538) ; v1(49.625,51.969) 56.621,51.969 56.625,51.973
  Top Layer w0.127: 56.625,51.973 61.627,51.973 62.356,52.702 62.356,52.931 62.375,52.95
  Signal Layer 3 w0.12: v1(15.55,15.85) 17.175,15.85 18.375,14.65 45.525,14.65 47.125,16.25 v1(49.625,16.25)
  Bottom Layer w0.12: v1(9.663,23.538) 9.663,20.612 12.125,18.15 15.5,18.15 16.234,17.416 16.234,16.534 v1(15.55,15.85) R148.1@15,15.85 ; v1(49.625,16.25) v1(49.625,51.969)
T_NRSTa: R108.2 U13.P3 | length 106.6
  Top Layer w0.12: R108.2@14.711,24.239 16.414,24.239 v1(16.425,24.25) ; U13.P3@119.133,24.777 v1(119.458,24.452)
  Signal Layer 3 w0.1: 109.908,24.922 116.241,24.922 116.456,24.707 117.672,24.707 117.815,24.85 119.06,24.85 v1(119.458,24.452)
  Signal Layer 3 w0.12: v1(16.425,24.25) 18.05,25.875 63,25.875 63.953,24.922 109.908,24.922
T_PWR_EN: R127.1 U13.R5 U23.4 | length 20
  Top Layer w0.12: R127.1@108.111,14.064 U23.4@109.761,14.064 110.114,14.064 111.75,15.7 v1(114.65,15.7) ; U13.R5@119.783,26.077 v1(120.108,25.752)
  Bottom Layer w0.12: v1(114.65,15.7) 114.65,16.55 120.108,22.008 v1(120.108,25.752)
T_PWR_EXT: R107.2 R109.2 U13.R4 | length 2.8
  Top Layer w0.127: U13.R4@119.783,25.427 120.27,24.939 R107.2@121.311,24.939 R109.2@121.311,23.864
T_SWCLK: CN7.6 JP2.1 R104.1 R153.1 U6.A12 U16.3 | length 97
  Top Layer w0.1: 59.175,52.85 61.55,52.85 64.7,56 U6.A12@64.7,56.625
  Top Layer w0.12: CN7.6@7.543,26.609 9.641,26.609 10,26.25 11.825,26.25 12.211,25.864 U16.3@12.211,25.786 ; U16.3@12.211,25.389 U16.3@12.211,25.786 ; JP2.1@21.171,32.385 16.111,27.325 14.3,27.325 13.811,26.836 R104.1@13.811,26.739 13.164,26.739 v1(12.7,26.275) U16.3@12.211,25.786 ; v1(21.6,48.25) 40.45,48.25 45.053,52.853 56.872,52.853
  Top Layer w0.127: 56.872,52.853 56.875,52.85 59.175,52.85
  Signal Layer 3 w0.12: v1(12.7,26.275) 12.7,25.2 14.275,23.625 14.275,15.225 16.05,13.45 16.05,12.1 v1(15.55,11.6)
  Bottom Layer w0.12: R153.1@15,11.6 v1(15.55,11.6) ; JP2.1@21.171,32.385 21.171,39.021 21.6,39.45 v1(21.6,48.25)
T_SWCLKa: R104.2 U13.M11 | length 106.6
  Top Layer w0.12: R104.2@14.711,26.739 14.722,26.75 v1(16.55,26.75) ; v1(117.508,30.302) U13.M11@117.833,29.977
  Signal Layer 3 w0.12: v1(16.55,28.375) 41.102,28.375 41.107,28.38 41.443,28.38 41.448,28.375 41.752,28.375 41.757,28.38 42.093,28.38 42.098,28.375 43.075,28.375 44.025,29.325 58.55,29.325 59.225,30 66.875,30 67.425,29.45 69.075,29.45 70.225,30.6 107.875,30.6 108.418,30.057 117.263,30.057 v1(117.508,30.302)
  Bottom Layer w0.12: v1(16.55,26.75) v1(16.55,28.375)
T_SWDIO: CN7.4 JP2.2 R103.1 R152.1 U6.B13 U16.4 | length 97.5
  Top Layer w0.1: 59.175,53.1 59.4,53.1 60.375,54.075 v1(61.3,54.075)
  Top Layer w0.12: CN7.4@7.543,27.879 11.81,27.879 12.211,27.478 U16.4@12.211,27.451 ; U16.4@12.211,27.089 U16.4@12.211,27.451 ; JP2.2@18.631,32.385 16.971,30.725 14.775,30.725 13.811,29.761 R103.1@13.811,27.939 v1(12.7,27.939) U16.4@12.211,27.451 ; v1(21.171,48.725) 39.55,48.725 43.925,53.1 56.625,53.1
  Top Layer w0.127: 56.625,53.1 59.175,53.1 ; v2(63.725,56.95) U6.B13@64.05,57.275
  Signal Layer 1 w0.1: v1(61.3,54.075) 61.1,54.275 61.1,55.4 61.25,55.55 61.25,56.3 61.9,56.95 v2(63.725,56.95)
  Signal Layer 3 w0.12: v1(12.7,27.939) 12.175,27.414 12.175,24.875 12.618,24.432 12.618,15.582 v1(15.55,12.65)
  Bottom Layer w0.12: R152.1@15,12.65 v1(15.55,12.65) ; JP2.2@18.631,32.385 18.631,37.406 21.171,39.946 v1(21.171,48.725)
T_SWDIO_IN: R97.1 U13.N12 | length 3.2
  Top Layer w0.12: U13.N12@118.483,30.627 118.808,30.952 120.202,30.952 120.689,31.439 R97.1@121.311,31.439
T_SWDIOa: R97.2 R103.2 U13.L2 | length 125.8
  Top Layer w0.12: R103.2@14.711,27.939 14.722,27.95 v1(15.8,27.95) ; U13.L2@117.183,24.127 v1(117.508,23.802) ; R97.2@122.211,31.439 v1(122.9,31.439)
  Signal Layer 3 w0.1: 109.908,23.802 113.049,23.802 113.444,23.407 114.422,23.407 114.817,23.802 v1(117.508,23.802)
  Signal Layer 3 w0.12: v1(15.65,22.65) 16.275,22.65 18.9,25.275 24.375,25.275 26.25,23.4 69.25,23.4 70.35,24.5 104.425,24.5 105.123,23.802 109.908,23.802 ; v1(117.508,23.802) v1(122.898,23.802)
  Bottom Layer w0.12: v1(15.65,22.65) 15.645,22.655 15.645,24.345 16.275,24.975 16.275,26.35 15.8,26.825 v1(15.8,27.95) ; v1(122.898,23.802) v1(122.9,31.439)
T_SWO: CN7.8 R106.1 R147.1 U6.A6 U16.1 | length 100.4
  Top Layer w0.1: 66.05,51.722 66.05,53.4 66.375,53.725 67.65,53.725 68.6,54.675 U6.A6@68.6,56.625
  Top Layer w0.12: CN7.8@7.543,25.339 7.593,25.389 U16.1@10.911,25.389 10.911,24.589 11.075,24.425 12.525,24.425 13.125,25.025 v1(13.125,25.489) R106.1@13.811,25.489 ; v1(16.4,47.4) 41.14,47.4 41.82,48.08 63.605,48.08 66.375,50.85 66.375,51.397
  Top Layer w0.127: 66.05,51.722 66.375,51.397
  Signal Layer 3 w0.12: v1(13.125,25.489) 14.625,23.989 14.625,17.825 v1(15.55,16.9)
  Bottom Layer w0.12: v1(13.125,25.489) 13.125,38.125 16.4,41.4 v1(16.4,47.4) ; R147.1@15,16.9 v1(15.55,16.9)
T_SWOa: R106.2 U13.D12 | length 103
  Top Layer w0.12: R106.2@14.711,25.489 v1(15.311,25.489) ; v1(112.308,30.952) U13.D12@112.633,30.627
  Signal Layer 3 w0.12: v1(15.311,29.3) 33.2,29.3 42.8,29.3 44.1,30.6 44.325,30.825 69.025,30.825 69.675,31.475 108.65,31.475 109.173,30.952 109.908,30.952 v1(112.308,30.952)
  Bottom Layer w0.12: v1(15.311,25.489) v1(15.311,29.3)
T_VCP_RX: CN7.13 R114.2 U6.K13 U18.1 | length 108.2
  Top Layer w0.127: CN7.13@3.479,21.529 5.201,21.529 6.091,20.639 U18.1@10.911,20.639 10.911,19.589 11.25,19.25 v1(13.825,19.25) 13.825,19.976 R114.2@13.811,19.989 ; v2(63.725,62.8) U6.K13@64.05,62.475
  Signal Layer 1 w0.1: v1(57.875,66.875) 57.875,66.55 58.13,66.295 58.585,66.295 58.88,66 60.525,66 v2(63.725,62.8)
  Signal Layer 3 w0.12: v1(18.875,62.595) 31.005,62.595 31.275,62.325 32.802,62.325 32.807,62.32 51.42,62.32 55.975,66.875 v1(57.875,66.875)
  Bottom Layer w0.12: v1(13.825,19.25) 12.695,20.38 12.695,22.395 13.581,23.282 13.581,36.926 18.875,42.219 v1(18.875,62.595)
T_VCP_TX: CN7.14 R110.1 U6.L14 U18.3 | length 97.1
  Top Layer w0.1: 59.175,64.075 60.4,64.075 61.675,62.8 63.075,62.8 U6.L14@63.4,63.125
  Top Layer w0.12: CN7.14@7.543,21.529 11.746,21.529 U18.3@12.211,21.064 ; U18.3@12.211,20.639 U18.3@12.211,21.064 ; R110.1@13.725,21.175 13.675,21.125 v1(13.1,21.125) 12.211,21.125 U18.3@12.211,21.064
  Top Layer w0.127: v1(56.3,65.125) 57.35,64.075 59.175,64.075
  Signal Layer 3 w0.12: v1(19.35,62.075) 19.63,62.355 30.906,62.355 31.176,62.085 32.703,62.085 32.708,62.08 51.519,62.08 54.564,65.125 v1(56.3,65.125)
  Bottom Layer w0.127: v1(13.1,21.125) 13.1,22.456 13.825,23.181 13.825,36.825 19.35,42.35 v1(19.35,62.075)
TD_N: R76.1 T3.3 U9.20 | length 27.1
  Top Layer w0.13: v1(113.525,64.45) 114.281,63.694 T3.3@114.281,63.279 ; R76.1@115.125,45.275 v1(115.125,45.925) 116.059,46.859 116.059,47.3 116,47.36 U9.20@116,47.85
  Bottom Layer w0.13: v1(113.525,64.45) 113.202,64.127 113.202,63.292 112.906,62.996 112.906,50.779 112.7,50.573 112.7,45.95 113.344,45.306 115.392,45.306 115.472,45.386 115.472,45.578 v1(115.125,45.925)
TD_P: R77.1 T3.1 U9.21 | length 28
  Top Layer w0.13: T3.1@111.741,63.279 111.741,63.694 v1(112.498,64.45) ; R77.1@116.2,45.275 v1(116.2,45.925) 116.2,46.461 116.44,46.702 116.44,47.3 116.5,47.36 U9.21@116.5,47.85
  Bottom Layer w0.13: v1(112.498,64.45) 112.821,64.127 112.821,63.45 112.525,63.154 112.525,50.937 112.319,50.731 112.319,45.792 113.186,44.925 115.55,44.925 115.853,45.228 115.853,45.578 v1(116.2,45.925)
USB_DEV_HS_CN_N: CN15.2 U29.5 | length 2.6
  Top Layer w0.155: CN15.2@114.125,4.15 114.125,4.902 114.259,5.037 114.259,6.214 114.186,6.287 U29.5@114.186,6.664
USB_DEV_HS_CN_P: CN15.3 U29.6 | length 2.6
  Top Layer w0.155: U29.6@114.686,6.664 114.686,6.287 114.64,6.241 114.64,5.037 114.775,4.902 CN15.3@114.775,4.15
USB_DEV_HS_N: U13.R14 U29.2 | length 28.4
  Top Layer w0.155: U29.2@114.186,7.964 v1(114.186,8.711) ; U13.R14@119.783,31.927 v1(120.252,31.927)
  Bottom Layer w0.155: v1(114.186,8.711) 114.365,8.89 114.365,10.179 115.769,11.583 115.769,15.794 121.475,21.5 121.475,25.95 120.925,26.501 120.925,31.861 120.725,32.061 120.386,32.061 v1(120.252,31.927)
USB_DEV_HS_P: U13.R15 U29.1 | length 29.2
  Top Layer w0.155: U29.1@114.686,7.964 114.686,8.461 v1(114.925,8.7) ; U13.R15@119.783,32.577 v1(120.252,32.577)
  Bottom Layer w0.155: v1(114.925,8.7) 114.746,8.879 114.746,10.021 116.15,11.425 116.15,15.636 121.856,21.342 121.856,26.108 121.306,26.658 121.306,32.019 120.883,32.442 120.386,32.442 v1(120.252,32.577)
USB_FS_DM: CN14.2 U6.C15 U25.3 | length 104.8
  Top Layer w0.155: v1(51.95,58) 52.15,58.2 52.15,58.514 52.786,59.15 56.05,59.15 57.409,57.791 62.413,57.791 62.548,57.925 U6.C15@62.75,57.925 ; CN14.2@84.425,4.125 84.425,4.878 84.291,5.012 84.291,6.348 84.09,6.548 84.09,8.825 84.315,9.05 U25.3@84.725,9.05 ; v1(84.55,9.75) 84.55,9.225 U25.3@84.725,9.05 ; U25.3@85.05,9.05 U25.3@84.725,9.05
  Bottom Layer w0.155: v1(51.95,58) 52.197,57.753 52.197,57.225 52.05,57.078 52.05,13.2 49.994,11.144 49.994,9.606 51.425,8.175 76.4,8.175 77.025,8.8 81.011,8.8 81.467,8.344 83.583,8.344 84.09,8.852 84.09,9.625 84.216,9.75 v1(84.55,9.75)
USB_FS_DP: CN14.3 U6.B15 U25.4 | length 102.9
  Top Layer w0.155: v1(52.825,57.95) 52.55,58.225 52.55,58.375 52.944,58.769 55.892,58.769 57.252,57.41 62.413,57.41 62.548,57.275 U6.B15@62.75,57.275 ; U25.4@82.75,9.05 U25.4@83.075,9.05 ; v1(83.25,9.75) 83.25,9.225 U25.4@83.075,9.05 ; CN14.3@83.775,4.125 83.775,4.878 83.91,5.012 83.91,6.19 83.709,6.391 83.709,8.825 83.485,9.05 U25.4@83.075,9.05
  Bottom Layer w0.155: v1(52.825,57.95) 52.578,57.703 52.578,57.067 52.431,56.92 52.431,13.042 50.375,10.986 50.375,9.764 51.583,8.556 76.242,8.556 76.411,8.725 76.867,9.181 81.169,9.181 81.625,8.725 83.425,8.725 83.709,9.009 83.709,9.625 83.584,9.75 v1(83.25,9.75)
USB_FS_ID: CN14.4 U6.C14 U25.6 | length 94
  Top Layer w0.1: 59.002,56.777 62.504,56.777 62.632,56.904 62.829,56.904 63.075,57.15 63.075,57.6 U6.C14@63.4,57.925
  Top Layer w0.127: v1(53.675,57.7) 54.127,58.152 55.248,58.152 56.623,56.777 59.002,56.777 ; v1(81.483,7.167) 82.733,7.167 U25.6@82.75,7.15 83.125,7.15 CN14.4@83.125,4.125
  Signal Layer 3 w0.127: v1(53.616,12.558) 54.225,11.95 79.775,11.95 81.483,10.242 v1(81.483,7.167)
  Bottom Layer w0.127: v1(53.616,12.558) 53.616,33.159 53,33.775 53,53.875 54.275,55.15 54.275,57.1 v1(53.675,57.7)
USB_FS_OVCR: R116.2 U6.B7 | length 63
  Top Layer w0.1: v1(67.375,54.425) 67.375,55.105 67.625,55.355 67.625,56.95 U6.B7@67.95,57.275
  Top Layer w0.12: R116.2@89.9,17.125 v1(89.9,17.875)
  Signal Layer 3 w0.12: v1(67.975,17.575) 89.6,17.575 v1(89.9,17.875)
  Bottom Layer w0.12: v1(67.375,54.425) 67.375,53.825 67.975,53.225 v1(67.975,17.575)
USB_FS_PWR_EN: R128.1 U6.R5 | length 84.9
  Top Layer w0.1: U6.R5@69.25,65.725 69.25,69.065
  Top Layer w0.12: R128.1@95.625,13.025 v1(95.625,13.75)
  Top Layer w0.127: 69.26,69.075 v1(69.26,69.85)
  Signal Layer 3 w0.1: 70.035,69.075 70.36,68.75 74.425,68.75 75.425,67.75
  Signal Layer 3 w0.12: v1(69.26,69.85) 70.035,69.075 ; 75.425,67.75 75.485,67.69 93.635,67.69 v1(94.025,67.3)
  Bottom Layer w0.12: v1(94.025,67.3) 95.625,65.7 v1(95.625,13.75)
USB_FS_VBUS: C112.1 CN14.1 D11.1 JP7.3 R135.2 U6.D13 U24.1 U25.1 | length 26.5
  Top Layer w0.127: v2(63.725,58.25) U6.D13@64.05,58.575
  Top Layer w0.2: R135.2@76.65,3.95 v1(77.275,3.95)
  Top Layer w0.4: CN14.1@85.075,4.125 85.075,7.125 U25.1@85.05,7.15 v1(86.25,7.15) ; v1(87.9,15.05) 87.9,13.9 88.1,13.7 C112.1@88.375,13.7 88.525,13.85 U24.1@90.925,13.85
  Top Layer w0.5: JP7.3@101.915,5.945 v1(101.915,10.778)
  Top Layer w0.508: v1(105.014,28.938) D11.1@105.014,29.944
  Signal Layer 1 w0.1: v1(53.7,55.875) 59.375,55.875 61.75,58.25 v2(63.725,58.25)
  other v1: 101.915,10.275
uSD_Detect: CN2.10 R3.1 U6.H3 | length 101
  Top Layer w0.12: v1(31,82.6) R3.1@37.35,82.6 CN2.10@39.975,82.6
  Top Layer w0.127: U6.H3@70.55,61.175 v2(70.875,60.85)
  Signal Layer 1 w0.1: v2(70.875,60.85) 70.875,60.844 71.144,60.575 72.525,60.575 73.75,59.35 v1(73.75,58.5)
  Signal Layer 3 w0.12: v1(31.225,49.325) 31.65,48.9 45.875,48.9 46.85,49.875 57.625,49.875 58.475,49.025 71.575,49.025 71.91,49.361 v1(74.535,49.361)
  Bottom Layer w0.12: v1(31,82.6) 31,57.825 31.225,57.6 v1(31.225,49.325) ; v1(73.75,58.5) 73.75,57.625 74.535,56.84 v1(74.535,49.361)
USER_LED1: R144.1 U6.M2 | length 97.9
  Top Layer w0.1: U6.M2@71.2,63.775 71.525,63.45 72.075,63.45 72.475,63.85 74.05,63.85 74.9,64.7 75.425,64.7
  Top Layer w0.12: 75.425,64.7 82.95,64.7 v1(86.55,61.1)
  Signal Layer 3 w0.12: v1(86.55,61.1) 86.58,61.07 96.28,61.07 96.8,60.55 142.15,60.55 142.67,61.07 v1(144.27,61.07)
  Bottom Layer w0.12: v1(144.27,61.07) 144.27,44.78 144.975,44.075 R144.1@149.925,44.075
USER_LED2: R143.1 U6.M1 | length 95
  Top Layer w0.1: U6.M1@71.85,63.775 72.05,63.775 72.375,64.1 74,64.1 74.85,64.95 75.425,64.95
  Top Layer w0.12: 75.425,64.95 83.273,64.95 86.748,61.475 v1(87.075,61.475)
  Signal Layer 3 w0.12: v1(87.075,61.475) 96.475,61.475 97,60.95 114.025,60.95 114.55,61.475 v1(144.775,61.475)
  Bottom Layer w0.12: v1(144.775,61.475) 144.775,47.4 145.875,46.3 R143.1@149.925,46.3
VDD_ETH: C33.2 R42.2 SB9.2 T3.2 | length 16.4
  Top Layer w0.381: v1(111.55,62.05) 112.326,62.05 112.711,61.664 C33.2@113.011,61.664 T3.2@113.011,63.279 ; SB9.2@117.65,60 117.65,59.85 117.564,59.764 R42.2@119.361,59.764 119.625,59.501 v1(119.625,58.875)
  Signal Layer 2 w0.6: v1(111.55,62.05) 112.45,62.95 115.55,62.95 v1(119.625,58.875)
VDD_MCU: C124.2 C125.2 C126.2 C127.2 C128.2 C129.2 C131.2 C133.2 C134.2 C135.2 C137.2 JP1.1 L2.1 L5.1 SB1.1 SB11.1 U6.D5 U6.D11 U6.E4 U6.E12 U6.G4 U6.H12 U6.K4 U6.L12 U6.M5 U6.M9 | length 18.1
  Top Layer w0.127: v1(64.375,58.9) U6.E12@64.7,59.225 ; v1(64.375,61.5) U6.H12@64.7,61.175 ; v1(64.375,63.45) U6.L12@64.7,63.125 ; v1(65.025,58.25) U6.D11@65.35,58.575 ; v1(66.325,64.1) U6.M9@66.65,63.775 ; U6.D5@69.25,58.575 v1(69.575,58.25) ; U6.M5@69.25,63.775 v1(69.575,64.1) ; U6.E4@69.9,59.225 v1(70.225,58.9) ; U6.G4@69.9,60.525 v1(70.225,60.2) ; U6.K4@69.9,62.475 v1(70.225,62.8)
  Top Layer w0.35: v1(53.45,60.725) SB11.1@54.725,60.725 ; v1(61.3,70.825) 61.3,70.125 61.35,70.075 ; L2.1@76.825,61.725 v1(77.675,61.725)
  Bottom Layer w0.127: C125.2@63.7,63.45 v1(64.375,63.45) ; C128.2@63.725,61.5 v1(64.375,61.5) ; C133.2@64.35,58.225 64.375,58.25 v1(64.375,58.9) ; C137.2@65.025,56.675 65.025,57.575 v1(65.025,58.25) ; v1(66.325,64.1) 66.325,64.75 C124.2@66.35,64.775 ; C126.2@69.525,63.375 69.575,63.425 v1(69.575,64.1) ; C134.2@69.575,57.6 v1(69.575,58.25) ; C129.2@69.7,59.95 69.95,60.2 v1(70.225,60.2) 70.725,60.7 71.9,60.7 L5.1@72.7,61.5 ; C127.2@70.175,62.2 70.225,62.25 v1(70.225,62.8) ; v1(70.225,58.9) 70.575,58.9 C131.2@70.825,58.65